# Altium PCB StrainNode.PcbDoc (part 2 of 2)
Units mm, origin at the board's own origin, x right, y up, seen from the top; angles counter-clockwise.
Board outline 65 x 65 mm, 4 copper layers (Top Layer 1, GND, 3V3, Bottom Layer 1), stack 0.408 mm thick; 79 components, 56 nets, 295 pads, 250 vias.
Unrouted connection lines stored in the file: 29.
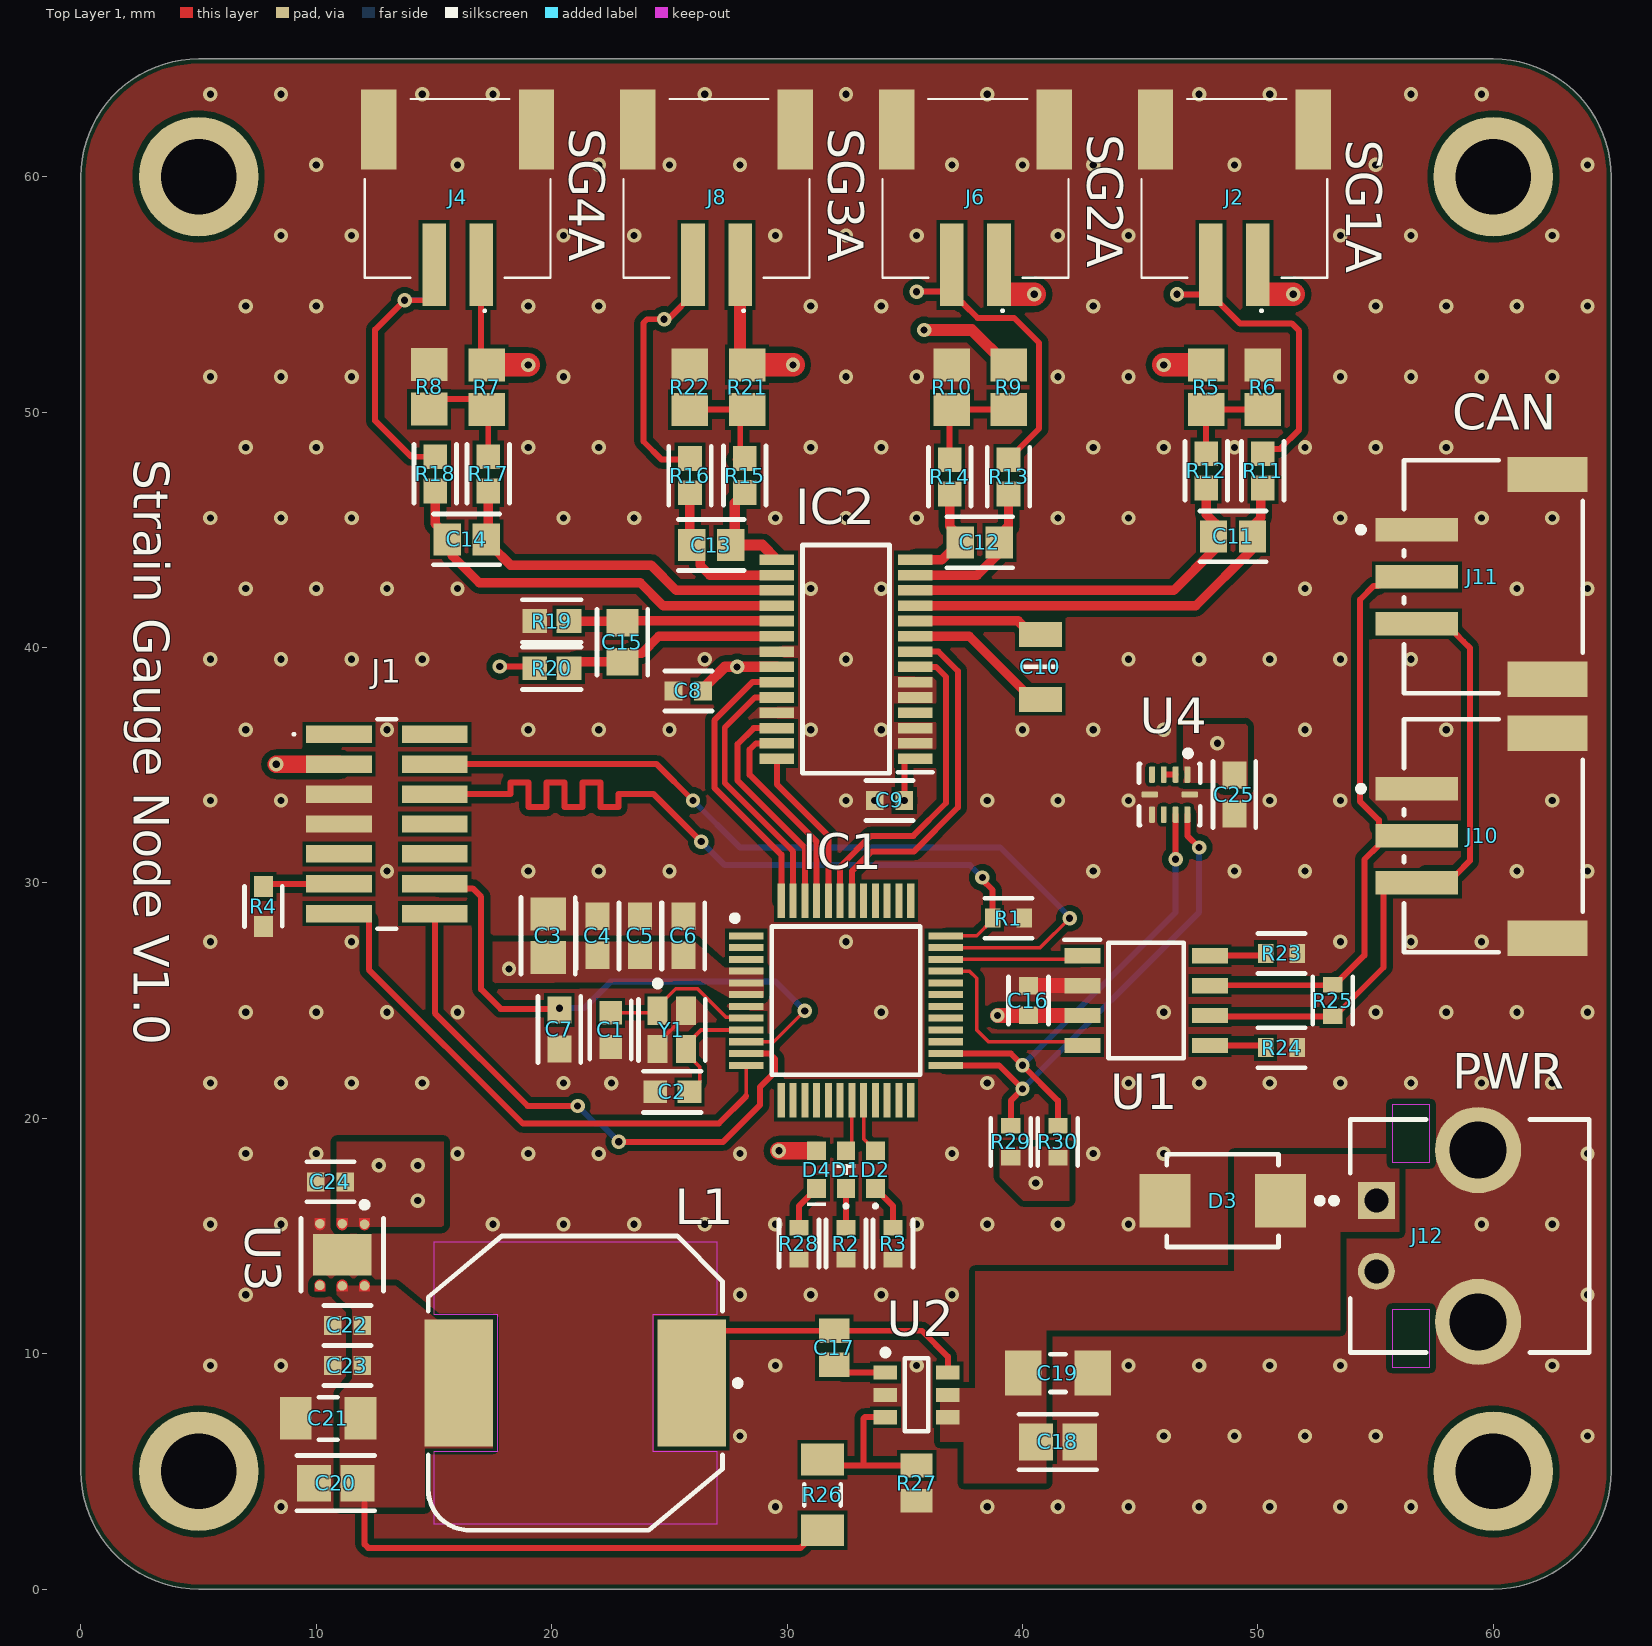
[diagram p0: Top Layer 1 view]

## Via types
v1: diameter 0.61, hole 0.305, Top Layer 1 to Bottom Layer 1, tented both sides, 250 vias

## Nets (pads, with @x,y where several pads share a name; then routed paths per layer and width w, separated by ;. In a path a pad name is that pad's centre, name@x,y a point inside that pad or via, vN(x,y) a via of type N, cw(c..) or ccw(c..) an arc to the next point about the centre after c; other vN are vias at no path point) (continued)
SWDIO: (continued)
  Bottom Layer 1 w0.254: v1(26,33.5) 27.994,31.506 39.043,31.506 42,28.549 v1(42,28.5)
VCP_RX: IC1.12 J1.13 | length 24
  Top Layer 1 w0.152: 28.262,20.937 IC1.12
  Top Layer 1 w0.254: J1.13 11.99,28.69 12.233,28.447 12.233,26.316 18.774,19.775 27.1,19.775 28.262,20.937
VCP_TX: IC1.11 J1.14 | length 24.5
  Top Layer 1 w0.254: J1.14 15.035,24.465 18.979,20.521 v1(21.1,20.521) ; v1(22.85,19) 27.281,19 28.852,20.571 28.852,21.336 29.487,21.971 29.487,22.513 29.25,22.75 IC1.11
  Bottom Layer 1 w0.254: v1(21.1,20.521) 21.836,19.784 22.066,19.784 v1(22.85,19)
Vin: C18.1 C19.1 D3.1 J12.1 U2.4 U2.5
XTAL2A: C1.1 IC1.8 Y1.1 | length 6.8
  Top Layer 1 w0.152: C1.1 23.579,24.476 24.413,24.476 Y1.1 24.499,24.738 25.262,25.5 25.981,25.5 26.193,25.5 27.4,24.294 28.218,24.294 IC1.8
XTAL2B: C2.1 IC1.9 Y1.3 | length 5.2
  Top Layer 1 w0.152: C2.1 25.877,21.123 26.28,21.526 26.28,22.182 25.699,22.763 Y1.3 25.699,23.113 26.337,23.75 IC1.9
pads on no net: IC1.1 IC1.2 IC1.3 IC1.13 IC1.14 IC1.15 IC1.16 IC1.17 IC1.18 IC1.21 IC1.22 IC1.23 IC1.24 IC1.27 IC1.28 IC1.29 IC1.30 IC1.31 IC1.32 IC1.37 IC1.38 IC1.39 IC1.40 IC1.41 IC2.4 J1.1 J1.2 J1.8 J1.9 J1.10 U3.4 U4.4 U4.7

## Polygon pours and split planes (outlines as drawn)
GND on Top Layer 1 "GND_L01_P013" (solid, pour order 13): 5,65 ccw(c5,60) 0,60 0,2.54 ccw(c2.54,2.54) 2.54,0 62.46,0 ccw(c62.46,2.54) 65,2.54 65,62.46 ccw(c62.46,62.46) 62.46,65 59,65
Vin on Top Layer 1 "VIN_L01_P012" (solid, pour order 12): 56,18.47 49,18.47 49,13.5 38,13.5 38,8.524 36.5,8.524 36.5,6.25 37.5,6.25 37.5,4.5 41,4.5 41,11 53.5,11 53.5,15.169 56,15.169
3V3 on Top Layer 1 "3V3_L01_P010" (solid, pour order 10): 39.026,18.64 39.026,17.5 40.026,16.5 41.974,16.5 41.974,18.797 39,18.797 39,18.882
3V3 on Top Layer 1 "3V3_L01_P009" (solid, pour order 9): 46.817,34.25 46.817,36.742 49.559,36.75 49.559,34 48.526,34 48.276,34.25 47.817,34.25
3V3 on Top Layer 1 "3V3_L01_P008" (solid, pour order 8): 17.5,27.499 17.5,25.74 26.337,25.8 27.541,25.115 28.997,25.099 28.986,26.385 27.35,26.385 26.085,27.506
5V0 on Top Layer 1 "5V0_L01_P007" (solid, pour order 7): 10.875,12.879 10.875,12.512 11.526,11.861 11.526,8.944 11,8.324 11,3.468 14.612,3.468 14.612,5.987 17.5,5.987 17.5,11.438 15.131,11.438 13.371,12.879
3V3 on Top Layer 1 "3V3 supply" (solid, pour order 0): 10.875,15.382 15.334,15.382 15.405,15.453 15.405,19.012 10.875,19.012
GND on Bottom Layer 1 "GND_L04_P004" (solid, pour order 4): -0.342,5.19 ccw(c5.123,5.19) 5.123,-0.275 59.658,-0.275 ccw(c59.658,4.725) 64.658,4.725 64.658,59.725 ccw(c59.658,59.725) 59.658,64.725 4.658,64.725 ccw(c4.658,59.725) -0.342,59.725
3V3 on 3V3 (split plane): 60.294,64.482 60.586,64.453 60.876,64.406 61.163,64.339 61.444,64.253 61.719,64.15 61.987,64.029 62.246,63.89 62.496,63.735 62.734,63.564 62.962,63.377 63.176,63.176 63.377,62.962 63.564,62.734 63.735,62.496 63.89,62.246 64.029,61.987 64.15,61.719 64.253,61.444 64.339,61.163 64.406,60.876 64.453,60.586 64.482,60.294 64.491,60.018 64.49,60 64.49,5 64.491,4.982 64.482,4.706 64.453,4.414 64.406,4.124 64.339,3.837 64.253,3.556 64.15,3.281 64.029,3.013 63.89,2.754 63.735,2.504 63.564,2.266 63.377,2.038 63.176,1.824 62.962,1.623 62.734,1.436 62.496,1.265 62.246,1.11 61.987,0.971 61.719,0.85 61.444,0.747 61.163,0.661 60.876,0.594 60.586,0.547 60.294,0.518 60.018,0.509 60,0.51 5,0.51 4.982,0.509 4.706,0.518 4.414,0.547 4.124,0.594 3.837,0.661 3.556,0.747 3.281,0.85 3.013,0.971 2.754,1.11 2.504,1.265 2.266,1.436 2.038,1.623 1.824,1.824 1.623,2.038 1.436,2.266 1.265,2.504 1.11,2.754 0.971,3.013 0.85,3.281 0.747,3.556 0.661,3.837 0.594,4.124 0.547,4.414 0.518,4.706 0.509,4.982 0.51,5 0.51,60 0.509,60.018 0.518,60.294 0.547,60.586 0.594,60.876 0.661,61.163 0.747,61.444 0.85,61.719 0.971,61.987 1.11,62.246 1.265,62.496 1.436,62.734 1.623,62.962 1.824,63.176 2.038,63.377 2.266,63.564 2.504,63.735 2.754,63.89 3.013,64.029 3.281,64.15 3.556,64.253 3.837,64.339 4.124,64.406 4.414,64.453 4.706,64.482 4.982,64.491 5,64.49 60,64.49 60.018,64.491
GND on GND (split plane): 60.294,64.482 60.586,64.453 60.876,64.406 61.163,64.339 61.444,64.253 61.719,64.15 61.987,64.029 62.246,63.89 62.496,63.735 62.734,63.564 62.962,63.377 63.176,63.176 63.377,62.962 63.564,62.734 63.735,62.496 63.89,62.246 64.029,61.987 64.15,61.719 64.253,61.444 64.339,61.163 64.406,60.876 64.453,60.586 64.482,60.294 64.491,60.018 64.49,60 64.49,5 64.491,4.982 64.482,4.706 64.453,4.414 64.406,4.124 64.339,3.837 64.253,3.556 64.15,3.281 64.029,3.013 63.89,2.754 63.735,2.504 63.564,2.266 63.377,2.038 63.176,1.824 62.962,1.623 62.734,1.436 62.496,1.265 62.246,1.11 61.987,0.971 61.719,0.85 61.444,0.747 61.163,0.661 60.876,0.594 60.586,0.547 60.294,0.518 60.018,0.509 60,0.51 5,0.51 4.982,0.509 4.706,0.518 4.414,0.547 4.124,0.594 3.837,0.661 3.556,0.747 3.281,0.85 3.013,0.971 2.754,1.11 2.504,1.265 2.266,1.436 2.038,1.623 1.824,1.824 1.623,2.038 1.436,2.266 1.265,2.504 1.11,2.754 0.971,3.013 0.85,3.281 0.747,3.556 0.661,3.837 0.594,4.124 0.547,4.414 0.518,4.706 0.509,4.982 0.51,5 0.51,60 0.509,60.018 0.518,60.294 0.547,60.586 0.594,60.876 0.661,61.163 0.747,61.444 0.85,61.719 0.971,61.987 1.11,62.246 1.265,62.496 1.436,62.734 1.623,62.962 1.824,63.176 2.038,63.377 2.266,63.564 2.504,63.735 2.754,63.89 3.013,64.029 3.281,64.15 3.556,64.253 3.837,64.339 4.124,64.406 4.414,64.453 4.706,64.482 4.982,64.491 5,64.49 60,64.49 60.018,64.491

## Silkscreen, mask and mechanical layers (free items; w line width, h text height)
Top Overlay:
  text "SG4A" at 20.746,62.048 h1.52 r270
  text "SG3A" at 31.746,62.048 h1.52 r270
  text "SG2A" at 42.746,61.798 h1.52 r270
  text "SG1A" at 53.754,61.566 h1.52 r270
  text "CAN" at 58.254,49.254 h1.52
  text "Strain Gauge Node V1.0" at 2.254,47.995 h1.5 r270
  text "PWR" at 58.254,21.254 h1.52
Bottom Overlay:
  text "SG4B" at 20.746,56.484 h1.52 r270
  text "SG3B" at 31.746,56.484 h1.52 r270
  text "SG2B" at 42.746,56.234 h1.52 r270
  text "SG1B" at 53.754,56.254 h1.52 r270
Bottom 3D Body:
  lines w0.254: 0,0 65,0 65,65 0,65 0,0